# EAGLE board CT_schematic (EAGLE 7.6.0)

Size 100 x 80 mm. Coordinates in mm from the lower left corner, seen from the top.
Outline: 0,0 100,0 100,80 0,80 0,0
Copper layers (1*16): Top 0.035mm / dielectric 1.5mm / Bottom 0.035mm
Design rules "default": minimum track width 10mil, minimum drill 24mil, track to track 8mil, track to pad 8mil, pad to pad 8mil, via to via 8mil, smd to smd 8mil, copper to edge 40mil, drill to drill 8mil, minimum pad ring 10mil, minimum via ring 8mil, stop-mask expansion 4mil, vias tented up to drill 0mil, thermal gap 10mil

## Footprints (pad centres in the part's own frame; a part is rotated, then mirrored left to right if it is on the bottom)
C0603 = smd 0.8 x 0.8: 1 -0.762,0; 2 0.762,0
C0402 = smd 0.5 x 0.5: 1 -0.508,0; 2 0.508,0
C0805 = smd 1.2 x 1.3: 1 -1.016,0; 2 1.016,0
C1210 = smd 1.2 x 2.5: 1 -1.524,0; 2 1.524,0
C1206 = smd 1.3 x 1.6: 1 -1.524,0; 2 1.524,0
2220 = smd 1.85 x 5.5: 1 -2.55,0; 2 2.55,0
R0603 = smd 0.8 x 0.8: 1 -0.762,0; 2 0.762,0
EXV-9H = smd 3.505 x 1.676: 1 -2.857,0; 2 2.857,0
L0603 = smd 0.8 x 0.8: 1 -0.762,0; 2 0.762,0
DR1040 = smd 1.6 x 3.2: 1 -4.458,0; 2 4.458,0
PJ-037B_PACKAGE = drill 3.7 square: 1 12,0 | drill 3.2 square: 2 6,0
UFBGA169 = smd 0.35 x 0.35: A1 -3.9,3.9; A2 -3.25,3.9; A3 -2.6,3.9; A4 -1.95,3.9; A5 -1.3,3.9; A6 -0.65,3.9; A7 0,3.9; A8 0.65,3.9; A9 1.3,3.9; A10 1.95,3.9; A11 2.6,3.9; A12 3.25,3.9; A13 3.9,3.9; B1 -3.9,3.25; B2 -3.25,3.25; B3 -2.6,3.25; B4 -1.95,3.25; B5 -1.3,3.25; B6 -0.65,3.25; B7 0,3.25; B8 0.65,3.25; B9 1.3,3.25; B10 1.95,3.25; B11 2.6,3.25; B12 3.25,3.25; B13 3.9,3.25; C1 -3.9,2.6; C2 -3.25,2.6; C3 -2.6,2.6; C4 -1.95,2.6; C5 -1.3,2.6; C6 -0.65,2.6; C7 0,2.6; C8 0.65,2.6; C9 1.3,2.6; C10 1.95,2.6; C11 2.6,2.6; C12 3.25,2.6; C13 3.9,2.6; D1 -3.9,1.95; D2 -3.25,1.95; D3 -2.6,1.95; D4 -1.95,1.95; D5 -1.3,1.95; D6 -0.65,1.95; D7 0,1.95; D8 0.65,1.95; D9 1.3,1.95; D10 1.95,1.95; D11 2.6,1.95; D12 3.25,1.95; D13 3.9,1.95; E1 -3.9,1.3; E2 -3.25,1.3; E3 -2.6,1.3; E4 -1.95,1.3; E5 -1.3,1.3; E6 -0.65,1.3; E7 0,1.3; E8 0.65,1.3; E9 1.3,1.3; E10 1.95,1.3; E11 2.6,1.3; E12 3.25,1.3; E13 3.9,1.3; F1 -3.9,0.65; F2 -3.25,0.65; F3 -2.6,0.65; F4 -1.95,0.65; F5 -1.3,0.65; F6 -0.65,0.65; F7 0,0.65; F8 0.65,0.65; F9 1.3,0.65; F10 1.95,0.65; F11 2.6,0.65; F12 3.25,0.65; F13 3.9,0.65; G1 -3.9,0; G2 -3.25,0; G3 -2.6,0; G4 -1.95,0; G5 -1.3,0; G6 -0.65,0; G7 0,0; G8 0.65,0; G9 1.3,0; G10 1.95,0; G11 2.6,0; G12 3.25,0; G13 3.9,0; H1 -3.9,-0.65; H2 -3.25,-0.65; H3 -2.6,-0.65; H4 -1.95,-0.65; H5 -1.3,-0.65; H6 -0.65,-0.65; H7 0,-0.65; H8 0.65,-0.65; H9 1.3,-0.65; H10 1.95,-0.65; H11 2.6,-0.65; H12 3.25,-0.65; H13 3.9,-0.65; J1 -3.9,-1.3; J2 -3.25,-1.3; J3 -2.6,-1.3; J4 -1.95,-1.3; J5 -1.3,-1.3; J6 -0.65,-1.3; J7 0,-1.3; J8 0.65,-1.3; J9 1.3,-1.3; J10 1.95,-1.3; J11 2.6,-1.3; J12 3.25,-1.3; J13 3.9,-1.3; K1 -3.9,-1.95; K2 -3.25,-1.95; K3 -2.6,-1.95; K4 -1.95,-1.95; K5 -1.3,-1.95; K6 -0.65,-1.95; K7 0,-1.95; K8 0.65,-1.95; K9 1.3,-1.95; K10 1.95,-1.95; K11 2.6,-1.95; K12 3.25,-1.95; K13 3.9,-1.95; L1 -3.9,-2.6; L2 -3.25,-2.6; L3 -2.6,-2.6; L4 -1.95,-2.6; L5 -1.3,-2.6; L6 -0.65,-2.6; L7 0,-2.6; L8 0.65,-2.6; L9 1.3,-2.6; L10 1.95,-2.6; L11 2.6,-2.6; L12 3.25,-2.6; L13 3.9,-2.6; M1 -3.9,-3.25; M2 -3.25,-3.25; M3 -2.6,-3.25; M4 -1.95,-3.25; M5 -1.3,-3.25; M6 -0.65,-3.25; M7 0,-3.25; M8 0.65,-3.25; M9 1.3,-3.25; M10 1.95,-3.25; M11 2.6,-3.25; M12 3.25,-3.25; M13 3.9,-3.25; N1 -3.9,-3.9; N2 -3.25,-3.9; N3 -2.6,-3.9; N4 -1.95,-3.9; N5 -1.3,-3.9; N6 -0.65,-3.9; N7 0,-3.9; N8 0.65,-3.9; N9 1.3,-3.9; N10 1.95,-3.9; N11 2.6,-3.9; N12 3.25,-3.9; N13 3.9,-3.9
ARDUCAM = drill 1 pad 1.8 square: 1 0,0 | drill 1 pad 1.8: 2 0,2.54; 3 2.54,0; 4 2.54,2.54; 5 5.08,0; 6 5.08,2.54; 7 7.62,0; 8 7.62,2.54; 9 10.16,0; 10 10.16,2.54; 11 12.7,0; 12 12.7,2.54; 13 15.24,0; 14 15.24,2.54; 15 17.78,0; 16 17.78,2.54; 17 20.32,0; 18 20.32,2.54; 19 22.86,0; 20 22.86,2.54
10100565 = smd 0.8 x 2.35: 1 0,0; 2 1.25,0; 3 2.55,0; 4 4.25,0; 5 5.43,0; 6 6.68,0; 7 7.93,0; 8 9.18,0; 9 11.67,0; 10 14.18,0; 11 15.43,0; 12 16.68,0; 13 17.93,0; 14 19.18,0; 15 21.68,0 | smd 1.5 x 3.1: 16 23.495,-1.375; 20 25.685,-22.875 | smd 1.55 x 3.1: 17 -1.815,-1.375; 21 -1.815,-22.875 | drill 1.1 pad 1.1: 18 21.68,-2.375; 19 0.68,-2.375
DFN8-S = smd 0.6 x 0.4: 1 -2.69,1.905; 2 -2.69,0.635; 3 -2.69,-0.635; 4 -2.69,-1.905; 5 2.69,-1.905; 6 2.69,-0.635; 7 2.69,0.635; 8 2.69,1.905
QFN-28 = smd 0.813 x 0.305: 1 -2.451,1.5; 2 -2.451,1; 3 -2.451,0.5; 4 -2.451,0; 5 -2.451,-0.5; 6 -2.451,-1; 7 -2.451,-1.5; 15 2.451,-1.5; 16 2.451,-1; 17 2.451,-0.5; 18 2.451,0; 19 2.451,0.5; 20 2.451,1; 21 2.451,1.5 | smd 0.305 x 0.813: 8 -1.5,-2.451; 9 -1,-2.451; 10 -0.5,-2.451; 11 0,-2.451; 12 0.5,-2.451; 13 1,-2.451; 14 1.5,-2.451; 22 1.5,2.451; 23 1,2.451; 24 0.5,2.451; 25 0,2.451; 26 -0.5,2.451; 27 -1,2.451; 28 -1.5,2.451 | smd 3.607 x 3.607: 29 0,0
SJ-43515TS-SMT-TR = smd 2.2 x 3: 1 0.6,-7.4; 4 3.4,-7.4 | smd 3 x 3: 2 12.8,-7.4; 5 17,-3 | smd 2 x 3: 3 5.3,0; 6 2.5,0 | drill 1.8: P$7 4.5,-3.69; P$8 11.54,-3.69
ABS07-32.768KHZ-7-T = smd 1.1 x 2.4: 1 -2.5,0; 2 0,0
ABLS-25.000MHZ-B2F-T = smd 5.6 x 2.8: 1 -3.81,0; 2 5.69,0
ABLS-12.288MHZ-B4-T = smd 5.6 x 2.8: 1 -3.81,0; 2 5.69,0
ASFL1 = smd 1.7 x 1.5: 1 -1.27,-1.1; 2 1.27,-1.1; 3 1.27,1.1; 4 -1.27,1.1
WSON-8 = smd 0.3 x 0.6: 1 -0.75,0; 2 0.05,0; 3 0.85,0; 4 1.65,0; 5 1.65,3.8; 6 0.85,3.8; 7 0.05,3.8; 8 -0.75,3.8 | smd 3 x 2.6: PAD 0.45,1.9
QFN-16_EP = smd 0.805 x 0.3: 1 -1.452,0.75; 2 -1.452,0.25; 3 -1.452,-0.25; 4 -1.452,-0.75; 9 1.452,-0.75; 10 1.452,-0.25; 11 1.452,0.25; 12 1.452,0.75 | smd 0.3 x 0.805: 5 -0.75,-1.452; 6 -0.25,-1.452; 7 0.25,-1.452; 8 0.75,-1.452; 13 0.75,1.452; 14 0.25,1.452; 15 -0.25,1.452; 16 -0.75,1.452 | smd 1.55 x 1.55: 17 0,0
QFN-38_UHF = smd 0.75 x 0.3: 1 -2.4,2.75; 2 -2.4,2.25; 3 -2.4,1.75; 4 -2.4,1.25; 6 -2.4,0.25; 7 -2.4,-0.25; 8 -2.4,-0.75; 9 -2.4,-1.25; 10 -2.4,-1.75; 11 -2.4,-2.25; 12 -2.4,-2.75; 20 2.4,-2.75; 21 2.4,-2.25; 22 2.4,-1.75; 23 2.4,-1.25; 24 2.4,-0.75; 25 2.4,-0.25; 26 2.4,0.25; 27 2.4,0.75; 28 2.4,1.25; 29 2.4,1.75; 30 2.4,2.25; 31 2.4,2.75 | smd 0.758 x 0.3: 5 -2.4,0.75 | smd 0.3 x 0.75: 13 -1.5,-3.4; 14 -1,-3.4; 15 -0.5,-3.4; 16 0,-3.4; 17 0.5,-3.4; 18 1,-3.4; 19 1.5,-3.4; 32 1.5,3.4; 33 1,3.4; 34 0.5,3.4; 35 0,3.4; 36 -0.5,3.4; 37 -1,3.4; 38 -1.5,3.4 | smd 3.2 x 5.2: 39 0,0
IRF8306MTRPBF = smd 0.9 x 1.85: 1 0,0; 2 0,-2.35; 6 6.4,0; 7 6.4,-2.35 | smd 0.75 x 0.75: 3 1.75,-1.175 | smd 1.45 x 0.87: 4 3.5,-0.565; 5 3.5,-1.785
SW_4-1437565-2 = smd 1.4 x 2.1: 1 -2.23,4.55; 2 -2.23,-4.55; 3 2.23,4.55; 4 2.23,-4.55
LGM67K-G1J2-24-Z = smd 0.8 x 1.4: A -2,0; C 0,0
NC7SZ125M5X = smd 1.3 x 0.7: 1 -1.3,0.95; 2 -1.3,0; 3 -1.3,-0.95; 4 1.3,-0.95; 5 1.3,0.95

## Placement (x,y rotation side)
C1  1e-06  [C0603]  -36.83,97.79 0 top  (outside the outline)
C2  1e-07  [C0603]  -40.64,97.79 0 top  (outside the outline)
C3  1e-07  [C0603]  -44.45,97.79 0 top  (outside the outline)
C4  1e-07  [C0603]  -48.26,97.79 0 top  (outside the outline)
C5  1e-07  [C0603]  -52.07,97.79 0 top  (outside the outline)
C6  1e-07  [C0603]  -55.88,97.79 0 top  (outside the outline)
C7  1e-07  [C0603]  -59.69,97.79 0 top  (outside the outline)
C8  1e-07  [C0603]  -63.5,97.79 0 top  (outside the outline)
C9  1e-07  [C0603]  -67.31,97.79 0 top  (outside the outline)
C10  1e-07  [C0603]  -71.12,97.79 0 top  (outside the outline)
C11  1e-07  [C0603]  -74.93,97.79 0 top  (outside the outline)
C12  1e-07  [C0603]  -78.74,97.79 0 top  (outside the outline)
C13  1e-07  [C0603]  -82.55,97.79 0 top  (outside the outline)
C14  1e-07  [C0603]  -86.36,97.79 0 top  (outside the outline)
C15  1e-07  [C0603]  -90.17,97.79 0 top  (outside the outline)
C16  1e-07  [C0603]  -93.98,97.79 0 top  (outside the outline)
C17  4.7e-06  [C0603]  -29.21,97.79 0 top  (outside the outline)
C18  1e-08  [C0603]  -15.24,102.87 0 top  (outside the outline)
C19  1e-06  [C0603]  -19.05,102.87 0 top  (outside the outline)
C20  1e-07  [C0402]  -87.63,102.87 0 top  (outside the outline)
C21  1e-07  [C0402]  -91.44,102.87 0 top  (outside the outline)
C22  1e-11  [C0402]  -95.25,102.87 0 top  (outside the outline)
C23  1e-11  [C0402]  -15.24,107.95 0 top  (outside the outline)
C24  1e-11  [C0402]  -19.05,107.95 0 top  (outside the outline)
C25  1e-11  [C0402]  -22.86,107.95 0 top  (outside the outline)
C26  1e-06  [C0603]  -22.86,102.87 0 top  (outside the outline)
C27  1e-07  [C0402]  -26.67,107.95 0 top  (outside the outline)
C28  1e-05  [C0805]  -21.59,82.55 0 top  (outside the outline)
C29  1e-08  [C0402]  -30.48,107.95 0 top  (outside the outline)
C30  2.2e-05  [C1210]  -68.58,74.93 0 top  (outside the outline)
C31  2.2e-05  [C1210]  -74.93,74.93 0 top  (outside the outline)
C32  1e-09  [C0402]  -34.29,107.95 0 top  (outside the outline)
C33  1e-09  [C0402]  -38.1,107.95 0 top  (outside the outline)
C34  1e-07  [C0402]  -41.91,107.95 0 top  (outside the outline)
C35  1e-07  [C0402]  -45.72,107.95 0 top  (outside the outline)
C36  1e-07  [C0402]  -49.53,107.95 0 top  (outside the outline)
C37  1e-07  [C0402]  -53.34,107.95 0 top  (outside the outline)
C38  1e-07  [C0402]  -57.15,107.95 0 top  (outside the outline)
C39  1e-05  [C0805]  -26.67,82.55 0 top  (outside the outline)
C40  1e-05  [C0805]  -31.75,82.55 0 top  (outside the outline)
C41  1e-05  [C0805]  -36.83,82.55 0 top  (outside the outline)
C42  1e-05  [C0805]  -41.91,82.55 0 top  (outside the outline)
C43  1e-05  [C0805]  -46.99,82.55 0 top  (outside the outline)
C44  2.2e-11  [C0402]  -80.01,102.87 0 top  (outside the outline)
C45  2.2e-11  [C0402]  -83.82,102.87 0 top  (outside the outline)
C46  1e-08  [C0402]  -60.96,107.95 0 top  (outside the outline)
C47  1e-08  [C0402]  -64.77,107.95 0 top  (outside the outline)
C48  1e-05  [C1206]  -81.28,74.93 0 top  (outside the outline)
C49  1e-05  [C0805]  -52.07,82.55 0 top  (outside the outline)
C50  1e-05  [C0805]  -57.15,82.55 0 top  (outside the outline)
C51  1e-06  [C0603]  -26.67,102.87 0 top  (outside the outline)
C52  1e-07  [C0402]  -68.58,107.95 0 top  (outside the outline)
C53  6.8e-05  [2220]  -59.69,49.53 0 top  (outside the outline)
C54  1e-08  [C0402]  -72.39,107.95 0 top  (outside the outline)
C55  1e-05  [C1206]  -87.63,74.93 0 top  (outside the outline)
C56  1e-05  [C0805]  -62.23,82.55 0 top  (outside the outline)
C57  1e-07  [C0402]  -76.2,107.95 0 top  (outside the outline)
C58  2.2e-06  [C0603]  -33.02,97.79 0 top  (outside the outline)
C59  2.45e-08  [R0603]  -81.28,87.63 0 top  (outside the outline)
C60  2.8258362168397e-09  [R0603]  -72.39,82.55 0 top  (outside the outline)
C61  7.105e-09  [R0603]  -85.09,82.55 0 top  (outside the outline)
C62  0.0001  [EXV-9H]  -64.77,58.42 0 top  (outside the outline)
C63  0.0001  [EXV-9H]  -76.2,58.42 0 top  (outside the outline)
C64  1e-08  [C0402]  -80.01,107.95 0 top  (outside the outline)
C65  1e-08  [C0402]  -83.82,107.95 0 top  (outside the outline)
F1  240.0  [L0603]  -30.48,102.87 0 top  (outside the outline)
I1  3.8e-06  [DR1040]  -82.55,35.56 0 top  (outside the outline)
J1  PJ-037B  [PJ-037B_PACKAGE]  -55.88,36.83 0 top  (outside the outline)
R2  1000.0  [R0603]  -34.29,102.87 0 top  (outside the outline)
R7  4700.0  [R0603]  -38.1,102.87 0 top  (outside the outline)
R8  4700.0  [R0603]  -41.91,102.87 0 top  (outside the outline)
R9  2200.0  [R0603]  -45.72,102.87 0 top  (outside the outline)
R11  2200.0  [R0603]  -49.53,102.87 0 top  (outside the outline)
R13  10000.0  [R0603]  -86.36,87.63 0 top  (outside the outline)
R14  10000.0  [R0603]  -91.44,87.63 0 top  (outside the outline)
R15  10000.0  [R0603]  -15.24,92.71 0 top  (outside the outline)
R16  10000.0  [R0603]  -20.32,92.71 0 top  (outside the outline)
R17  100000.0  [R0603]  -90.17,82.55 0 top  (outside the outline)
R18  100000.0  [R0603]  -15.24,87.63 0 top  (outside the outline)
R19  100000.0  [R0603]  -20.32,87.63 0 top  (outside the outline)
R20  100000.0  [R0603]  -25.4,87.63 0 top  (outside the outline)
R21  100000.0  [R0603]  -30.48,87.63 0 top  (outside the outline)
R22  100000.0  [R0603]  -35.56,87.63 0 top  (outside the outline)
R23  100000.0  [R0603]  -40.64,87.63 0 top  (outside the outline)
R24  100000.0  [R0603]  -45.72,87.63 0 top  (outside the outline)
R25  100000.0  [R0603]  -50.8,87.63 0 top  (outside the outline)
R26  100000.0  [R0603]  -55.88,87.63 0 top  (outside the outline)
R27  100000.0  [R0603]  -60.96,87.63 0 top  (outside the outline)
R28  10000.0  [R0603]  -25.4,92.71 0 top  (outside the outline)
R29  10000.0  [R0603]  -30.48,92.71 0 top  (outside the outline)
R30  10000.0  [R0603]  -35.56,92.71 0 top  (outside the outline)
R31  47000.0  [R0603]  -40.64,92.71 0 top  (outside the outline)
R32  47000.0  [R0603]  -45.72,92.71 0 top  (outside the outline)
R33  47000.0  [R0603]  -50.8,92.71 0 top  (outside the outline)
R34  680.0  [R0603]  -53.34,102.87 0 top  (outside the outline)
R35  100000.0  [R0603]  -66.04,87.63 0 top  (outside the outline)
R36  200.0  [R0603]  -57.15,102.87 0 top  (outside the outline)
R37  1000.0  [R0603]  -60.96,102.87 0 top  (outside the outline)
R38  20000.0  [R0603]  -55.88,92.71 0 top  (outside the outline)
R39  91000.0  [R0603]  -60.96,92.71 0 top  (outside the outline)
R40  300000.0  [R0603]  -71.12,87.63 0 top  (outside the outline)
R41  100000.0  [R0603]  -76.2,87.63 0 top  (outside the outline)
R42  200.0  [R0603]  -64.77,102.87 0 top  (outside the outline)
R43  1000.0  [R0603]  -68.58,102.87 0 top  (outside the outline)
R44  10000.0  [R0603]  -66.04,92.71 0 top  (outside the outline)
R45  75000.0  [R0603]  -71.12,92.71 0 top  (outside the outline)
R46  10000.0  [R0603]  -76.2,92.71 0 top  (outside the outline)
R47  10000.0  [R0603]  -81.28,92.71 0 top  (outside the outline)
R48  95300.0  [R0603]  -86.36,92.71 0 top  (outside the outline)
R49  95300.0  [R0603]  -91.44,92.71 0 top  (outside the outline)
R50  10000.0  [R0603]  -15.24,97.79 0 top  (outside the outline)
R51  10000.0  [R0603]  -20.32,97.79 0 top  (outside the outline)
R52  10000.0  [R0603]  -25.4,97.79 0 top  (outside the outline)
R53  76618.181818182  [R0603]  -80.01,82.55 0 top  (outside the outline)
U1  STM32F439AIH6  [UFBGA169]  -53.34,7.62 0 top  (outside the outline)
U2  arducam_ov2640  [ARDUCAM]  -40.64,73.66 0 top  (outside the outline)
U3  10100565  [10100565]  -40.64,25.4 0 top  (outside the outline)
U4  24AA256-I/MF  [DFN8-S]  -22.86,49.53 0 top  (outside the outline)
U5  WM8731CLSEFL  [QFN-28]  -60.96,76.2 0 top  (outside the outline)
U6  SJ-43515TS-SMT-TR  [SJ-43515TS-SMT-TR]  -85.09,10.16 0 top  (outside the outline)
U7  SJ-43515TS-SMT-TR  [SJ-43515TS-SMT-TR]  -39.37,39.37 0 top  (outside the outline)
U8  ABS07-32.768KHZ-7-T  [ABS07-32.768KHZ-7-T]  -69.85,68.58 0 top  (outside the outline)
U9  ABLS-25.000MHZ-B2F-T  [ABLS-25.000MHZ-B2F-T]  -26.67,68.58 0 top  (outside the outline)
U10  ABLS-12.288MHZ-B4-T  [ABLS-12.288MHZ-B4-T]  -46.99,68.58 0 top  (outside the outline)
U11  ASFL1-25MHZ-NCS  [ASFL1]  -46.99,59.69 0 top  (outside the outline)
U12  LP3878SDX-ADJ/NOPB  [WSON-8]  -81.28,46.99 0 top  (outside the outline)
U13  LTC3601EUD#PBF  [QFN-16_EP]  -73.66,102.87 0 top  (outside the outline)
U14  LP3878SDX-ADJ/NOPB  [WSON-8]  -30.48,57.15 0 top  (outside the outline)
U15  LTC2928CUHF#PBF  [QFN-38_UHF]  -54.61,58.42 0 top  (outside the outline)
U16  IRF8306MTRPbF  [IRF8306MTRPBF]  -39.37,50.8 0 top  (outside the outline)
U17  IRF8306MTRPbF  [IRF8306MTRPBF]  -54.61,50.8 0 top  (outside the outline)
U18  4-1437565-2  [SW_4-1437565-2]  -72.39,35.56 0 top  (outside the outline)
U19  Q65110A2395  [LGM67K-G1J2-24-Z]  -48.26,76.2 0 top  (outside the outline)
U20  nc7sz125m5x  [NC7SZ125M5X]  -92.71,74.93 0 top  (outside the outline)
U21  nc7sz125m5x  [NC7SZ125M5X]  -15.24,81.28 0 top  (outside the outline)

## Library data of the parts
C1-C65 F1 I1 J1 R2 R7-R9 R11 R13-R53 U1-U21 = circuit_tree

## Nets
CLK_CRYSTAL_U1_E1: C22.1 U1.E1 U8.1
CLK_CRYSTAL_U1_F1: C23.1 U1.F1 U8.2
CLK_CRYSTAL_U1_G1: C24.1 U1.G1 U9.1
CLK_CRYSTAL_U1_G2: C25.1 U1.G2 U9.2
CLK_CRYSTAL_U5_1: C44.1 U5.1 U10.1
CLK_CRYSTAL_U5_2: C45.1 U5.2 U10.2
CLK_U2_8: U2.8 U11.3
GND: C1.2 C2.2 C3.2 C4.2 C5.2 C6.2 C7.2 C8.2 C9.2 C10.2 C11.2 C12.2 C13.2 C14.2 C15.2 C16.2 C17.2 C18.2 C19.2 C20.2 C21.2 C22.2 C23.2 C24.2 C25.2 C26.2 C27.2 C28.2 C29.2 C33.2 C34.2 C35.2 C36.2 C37.2 C38.2 C39.2 C40.2 C41.2 C42.2 C43.2 C44.2 C45.2 C46.2 C47.2 C48.2 C49.2 C50.2 C51.2 C53.1 C53.2 C54.2 C55.2 C56.2 C57.2 C58.2 C59.2 C60.2 C61.2 C62.2 C63.2 C64.2 C65.2 J1.2 R2.2 R15.2 R29.2 R30.2 R31.2 R32.2 R33.2 R37.2 R38.2 R40.2 R43.2 R45.2 R48.2 R49.2 R50.2 R51.2 R52.2 U1.D7 U1.D11 U1.E7 U1.F5 U1.F6 U1.G7 U1.G9 U1.J1 U1.J2 U1.J6 U1.J7 U1.J10 U2.2 U2.20 U3.6 U3.10 U3.12 U3.16 U3.17 U3.20 U3.21 U4.4 U4.7 U5.4 U5.15 U5.19 U5.25 U5.26 U5.29 U6.1 U7.1 U11.2 U12.3 U12.PAD U13.1 U13.9 U13.17 U14.3 U14.PAD U15.8 U15.9 U15.10 U15.12 U15.13 U15.24 U15.25 U15.30 U15.32 U15.39 U19.C U20.1 U20.3 U21.1 U21.3
NET_U1_A5: R14.1 U1.A5
NET_U1_B5: R11.1 U1.B5 U4.5
NET_U1_C3: R13.1 U1.C3
NET_U1_C5: R9.1 U1.C5 U4.6
NET_U1_D12: C21.1 U1.D12
NET_U1_H2: R7.1 U1.H2 U20.4
NET_U1_J4: C18.1 C19.1 F1.1 U1.J3 U1.J4
NET_U1_L5: R15.1 U1.L5
NET_U1_M1: R16.1 U1.M1
NET_U1_N11: U19.A
NET_U1_N12: U18.3 U18.4
NET_U2_19: R8.1 U2.19 U21.4
NET_U3_1: R19.1 U3.1
NET_U3_2: R18.1 U3.2
NET_U3_18: U3.18 U3.19
NET_U4_1: R28.1 U4.1
NET_U4_2: R29.1 U4.2
NET_U4_3: R30.1 U4.3
NET_U5_9: U5.9
NET_U5_20: C38.1 C43.1 U5.20
NET_U6_2: C31.1 R32.1 U6.2
NET_U6_5: C30.1 R31.1 U6.5
NET_U6_13: C30.2
NET_U6_14: C31.2
NET_U7_5: C32.1 C33.1 R33.1 R34.1 U7.5
NET_U7_21: R34.2
NET_U7_22: C32.2
NET_U12_1: C47.1 U12.1
NET_U12_6: R36.2 R37.1 U12.6
NET_U12_8: R35.1 U12.8
NET_U13_3: C52.2 I1.1 U13.3 U13.4
NET_U13_6: C52.1 U13.6
NET_U13_7: C51.1 U13.7 U13.12
NET_U13_10: R40.1 U13.10
NET_U13_11: R38.1 R39.1 U13.11
NET_U13_14: U13.14
NET_U13_ATNET_3: I1.2 R39.2
NET_U14_1: C54.1 U14.1
NET_U14_6: R42.2 R43.1 U14.6
NET_U14_8: R41.1 U14.8
NET_U15_3: R51.1 U15.3
NET_U15_6: R48.1 U15.6
NET_U15_7: R49.1 U15.7
NET_U15_16: R50.1 R53.1 U15.16
NET_U15_18: R47.1 U15.18
NET_U15_19: R46.1 U15.19 U15.20
NET_U15_21: R44.1 R45.1 U15.21 U20.2 U21.2
NET_U15_22: C57.1 R44.2 R46.2 R47.2 U15.11 U15.22
NET_U15_26: C60.1 U15.26
NET_U15_27: C59.1 U15.27
NET_U15_28: C61.1 U15.28
NET_U15_38: R52.1 U15.38
NET_U16_3: U15.2 U16.3
NET_U17_3: U15.37 U17.3
NET_U18_1: R2.1 U18.1 U18.2
PROC_DCMI_D0: U1.E8 U2.18
PROC_DCMI_D1: U1.E9 U2.17
PROC_DCMI_D2: U1.B4 U2.16
PROC_DCMI_D3: U1.A4 U2.15
PROC_DCMI_D4: U1.C2 U2.14
PROC_DCMI_D5: U1.A9 U2.13
PROC_DCMI_D6: U1.A2 U2.12
PROC_DCMI_D7: U1.B1 U2.11
PROC_DCMI_D8: U1.C11 U2.10
PROC_DCMI_D9: U1.B12 U2.9
PROC_DCMI_HSYNC: U1.L10 U2.6
PROC_DCMI_PIXCK: U1.N3 U2.7
PROC_DCMI_VSYNC: U1.A3 U2.5
PROC_I2S2_CK: U1.L9 U5.7
PROC_I2S2_EXT_SD: U1.H6 U5.10
PROC_I2S2_SD: U1.A12 U5.8
PROC_I2S2_WS: U1.B13 U5.9 U5.11
PROC_SDIO_CK: R17.1 U3.8
PROC_SDIO_D0: R20.1 U3.4
PROC_SDIO_D1: R21.1 U3.3
PROC_SDIO_D2: R22.1 U3.15
PROC_SDIO_D3: R23.1 U3.14
PROC_SDIO_D4: R24.1 U3.13
PROC_SDIO_D5: R25.1 U3.11
PROC_SDIO_D6: R26.1 U3.7
PROC_SDIO_D7: R27.1 U3.5
VCC_9V7: C58.1 C62.1 C63.1 J1.1 R53.2 U15.23 U16.1 U16.2 U16.6 U16.7 U17.1 U17.2 U17.6 U17.7
VCC_S1_9V7: C48.1 C50.1 R35.2 U12.4 U13.15 U13.16 U16.4 U16.5
VCC_S2_9V7: C55.1 R41.2 U14.4 U17.4 U17.5
VCC_TIER1_1V2: C20.1 C49.1 R36.1 U1.N9 U12.5
VCC_TIER1_3V3: C1.1 C2.1 C3.1 C4.1 C5.1 C6.1 C7.1 C8.1 C9.1 C10.1 C11.1 C12.1 C13.1 C14.1 C15.1 C16.1 C17.1 C26.1 C27.1 C28.1 C29.1 C34.1 C35.1 C36.1 C37.1 C39.1 C40.1 C41.1 C42.1 C46.1 C53.2 C64.1 C65.1 F1.2 I1.2 R7.2 R8.2 R9.2 R11.2 R13.2 R14.2 R16.2 R17.2 R18.2 R19.2 R20.2 R21.2 R22.2 R23.2 R24.2 R25.2 R26.2 R27.2 R28.2 R39.2 U1.D3 U1.D6 U1.D10 U1.E5 U1.E6 U1.F4 U1.F7 U1.F8 U1.G8 U1.G10 U1.H4 U1.H8 U1.J11 U1.K6 U1.L6 U2.1 U3.9 U4.8 U5.3 U5.5 U5.12 U5.18 U11.4 U13.8 U20.5 U21.5
VCC_TIER2_1V2: C56.1 R42.1 U14.5

## Tracks (layer width: path | path; a pad name or v marks a point on that pad's centre or on a via)
CLK_CRYSTAL_U1_E1  (2 unrouted)
CLK_CRYSTAL_U1_F1  (2 unrouted)
CLK_CRYSTAL_U1_G1  (2 unrouted)
CLK_CRYSTAL_U1_G2  (2 unrouted)
CLK_CRYSTAL_U5_1  (2 unrouted)
CLK_CRYSTAL_U5_2  (2 unrouted)
CLK_U2_8  (1 unrouted)
GND  (133 unrouted)
NET_U1_A5  (1 unrouted)
NET_U1_B5  (2 unrouted)
NET_U1_C3  (1 unrouted)
NET_U1_C5  (2 unrouted)
NET_U1_D12  (1 unrouted)
NET_U1_H2  (2 unrouted)
NET_U1_J4  (4 unrouted)
NET_U1_L5  (1 unrouted)
NET_U1_M1  (1 unrouted)
NET_U1_N12  (1 unrouted)
NET_U2_19  (2 unrouted)
NET_U3_1  (1 unrouted)
NET_U3_2  (1 unrouted)
NET_U3_18  (1 unrouted)
NET_U4_1  (1 unrouted)
NET_U4_2  (1 unrouted)
NET_U4_3  (1 unrouted)
NET_U5_20  (2 unrouted)
NET_U6_2  (2 unrouted)
NET_U6_5  (2 unrouted)
NET_U7_5  (4 unrouted)
NET_U12_1  (1 unrouted)
NET_U12_6  (2 unrouted)
NET_U12_8  (1 unrouted)
NET_U13_3  (3 unrouted)
NET_U13_6  (1 unrouted)
NET_U13_7  (2 unrouted)
NET_U13_10  (1 unrouted)
NET_U13_11  (2 unrouted)
NET_U13_ATNET_3  (1 unrouted)
NET_U14_1  (1 unrouted)
NET_U14_6  (2 unrouted)
NET_U14_8  (1 unrouted)
NET_U15_3  (1 unrouted)
NET_U15_6  (1 unrouted)
NET_U15_7  (1 unrouted)
NET_U15_16  (2 unrouted)
NET_U15_18  (1 unrouted)
NET_U15_19  (2 unrouted)
NET_U15_21  (4 unrouted)
NET_U15_22  (5 unrouted)
NET_U15_26  (1 unrouted)
NET_U15_27  (1 unrouted)
NET_U15_28  (1 unrouted)
NET_U15_38  (1 unrouted)
NET_U16_3  (1 unrouted)
NET_U17_3  (1 unrouted)
NET_U18_1  (2 unrouted)
PROC_DCMI_D0  (1 unrouted)
PROC_DCMI_D1  (1 unrouted)
PROC_DCMI_D2  (1 unrouted)
PROC_DCMI_D3  (1 unrouted)
PROC_DCMI_D4  (1 unrouted)
PROC_DCMI_D5  (1 unrouted)
PROC_DCMI_D6  (1 unrouted)
PROC_DCMI_D7  (1 unrouted)
PROC_DCMI_D8  (1 unrouted)
PROC_DCMI_D9  (1 unrouted)
PROC_DCMI_HSYNC  (1 unrouted)
PROC_DCMI_PIXCK  (1 unrouted)
PROC_DCMI_VSYNC  (1 unrouted)
PROC_I2S2_CK  (1 unrouted)
PROC_I2S2_EXT_SD  (1 unrouted)
PROC_I2S2_SD  (1 unrouted)
PROC_I2S2_WS  (2 unrouted)
PROC_SDIO_CK  (1 unrouted)
PROC_SDIO_D0  (1 unrouted)
PROC_SDIO_D1  (1 unrouted)
PROC_SDIO_D2  (1 unrouted)
PROC_SDIO_D3  (1 unrouted)
PROC_SDIO_D4  (1 unrouted)
PROC_SDIO_D5  (1 unrouted)
PROC_SDIO_D6  (1 unrouted)
PROC_SDIO_D7  (1 unrouted)
VCC_9V7  (13 unrouted)
VCC_S1_9V7  (7 unrouted)
VCC_S2_9V7  (4 unrouted)
VCC_TIER1_1V2  (4 unrouted)
VCC_TIER1_3V3  (80 unrouted)
VCC_TIER2_1V2  (2 unrouted)